# EAGLE board ESE323-Oscilloscope Project (EAGLE 9.7.0)
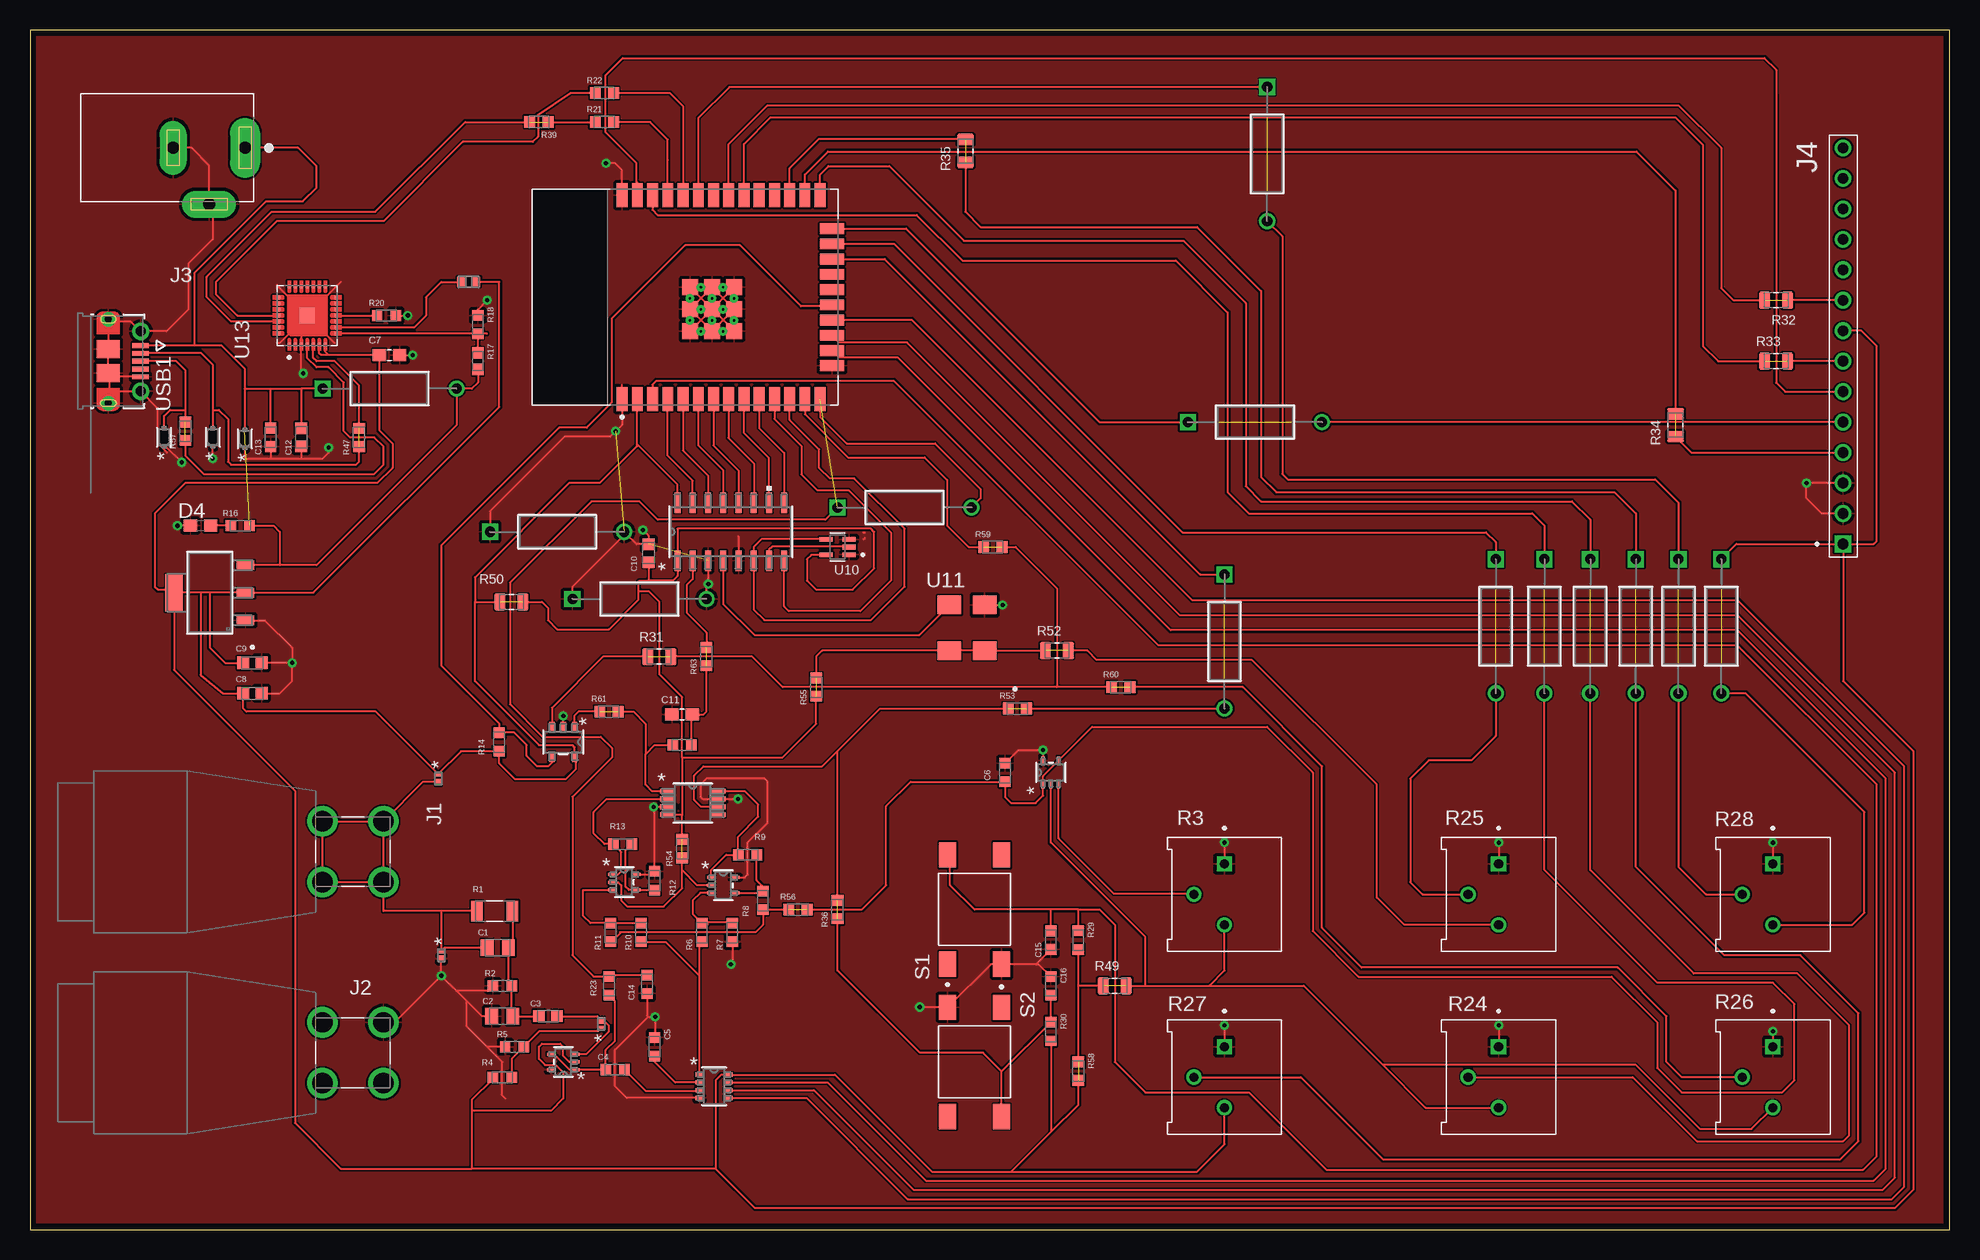
[diagram p0: board, top side]
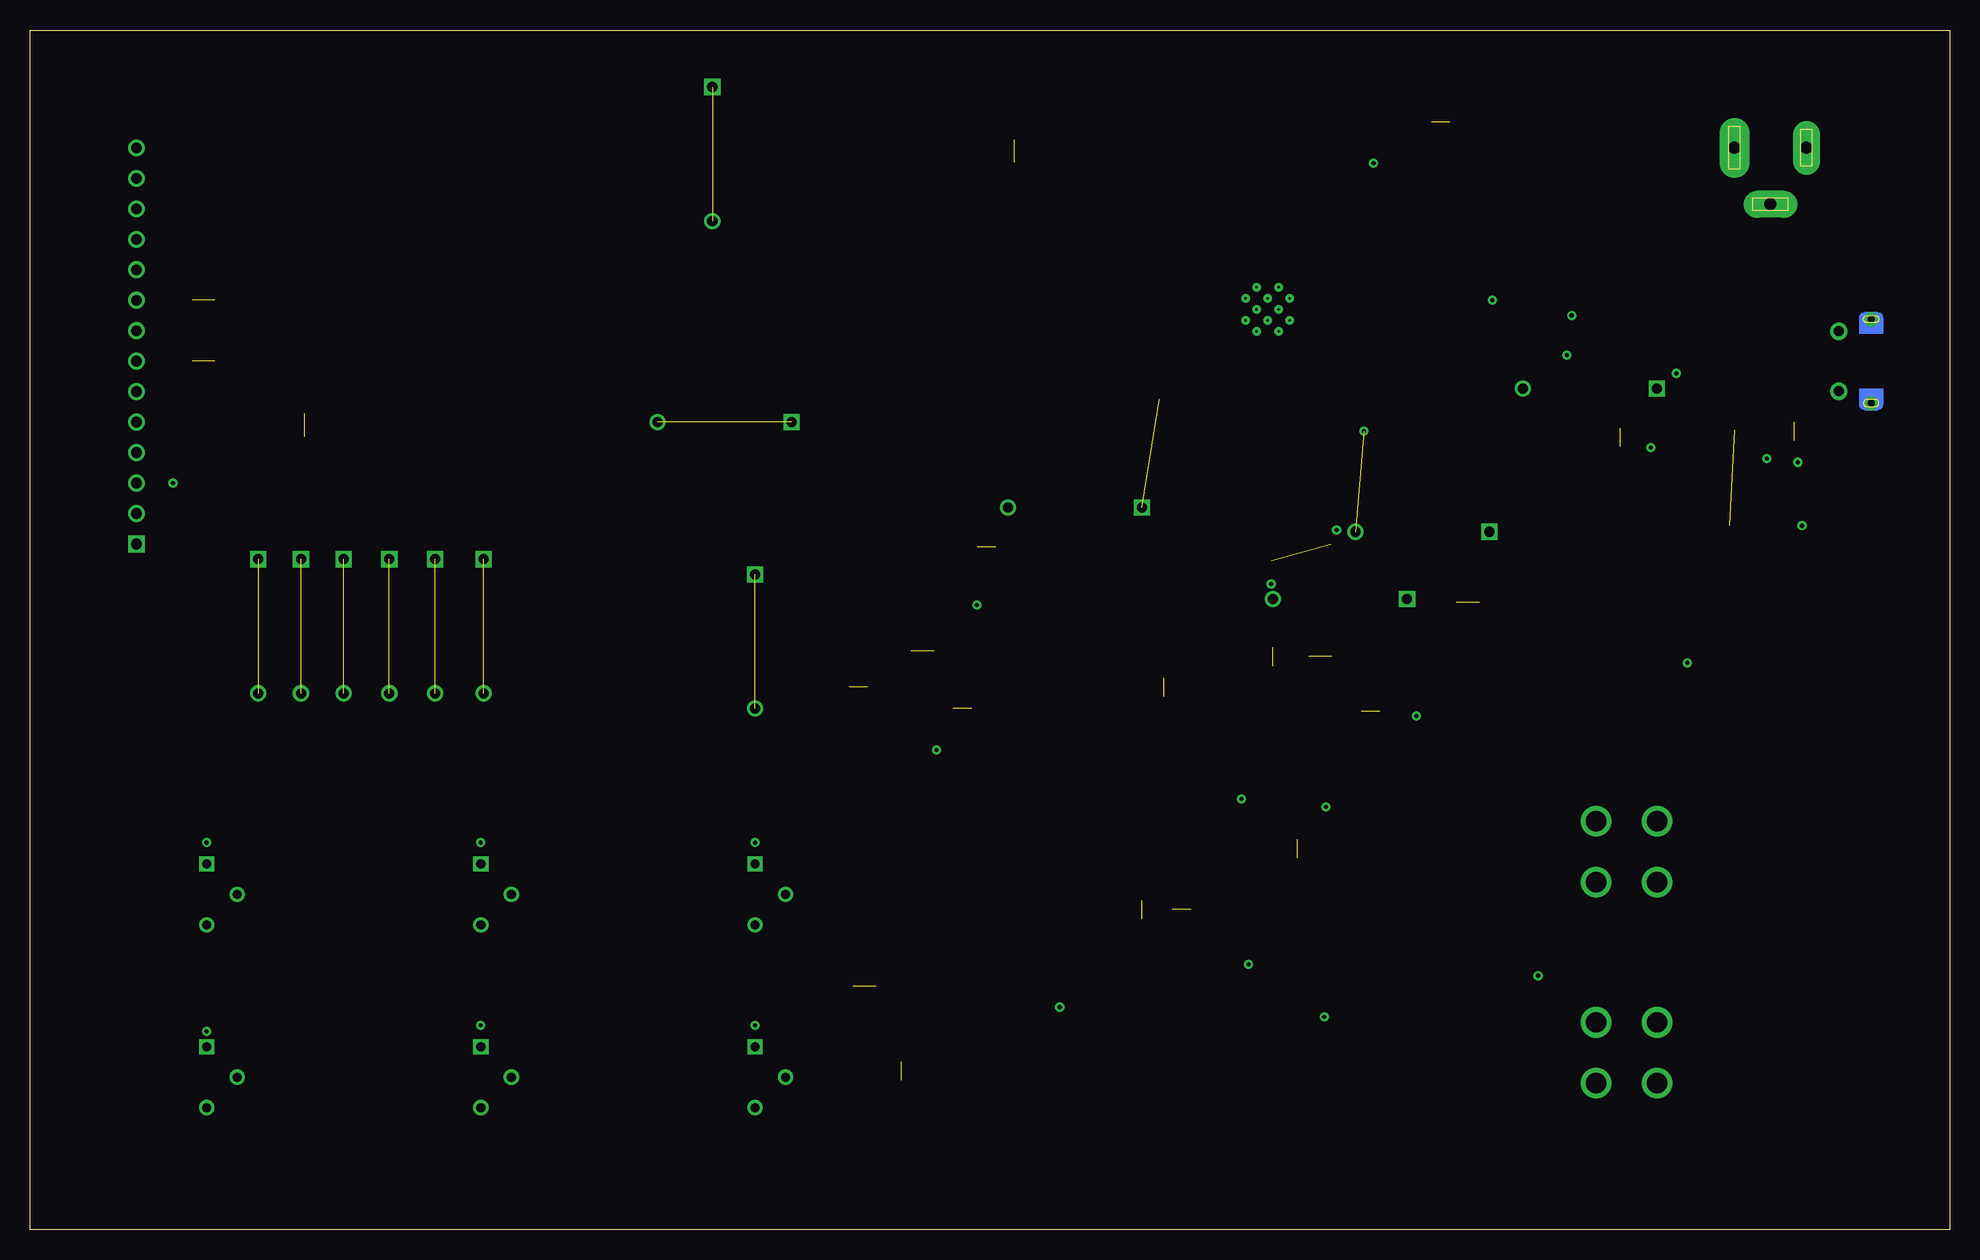
[diagram p1: board, bottom side, seen from below]

Size 160 x 100 mm. Coordinates in mm from the lower left corner, seen from the top.
Outline: 0,0 160,0 160,100 0,100 0,0
Copper layers (1*16): Top / Bottom
Stack-up Default Layer Stack: Top User Defined 0.035mm / Dielectric-1 User Defined 1.5mm / Bottom User Defined 0.035mm
Design rules: minimum copper width 6mil, minimum drill size 6mil, copper clearance wire_polygon to wire_polygon 6mil, copper clearance wire_polygon to pad_smd 6mil, copper clearance wire_polygon to via 6mil, copper clearance pad_smd to pad_smd 6mil, copper clearance pad_smd to via 6mil, copper clearance via to via 6mil, copper clearance smd to pad (same net) 6mil, copper clearance smd to via (same net) 6mil, copper clearance smd to smd (same net) 6mil, dimension clearance 20mil, restrict clearance 0mil, drill distance 6mil, keepout clearance 0mil

## Footprints (pad centres in the part's own frame; a part is rotated, then mirrored left to right if it is on the bottom)
GRM2165C2A102JA01D = smd 1.05 x 1.38: 1 -0.888,0; 2 0.888,0
GRM2195C1H912JA01D = smd 1.05 x 1.38: 1 -0.888,0; 2 0.888,0
GRM188R61A106ME69D = smd 0.96 x 0.97: 1 -0.755,0; 2 0.755,0
GCJ188R71H104KA12D = smd 0.89 x 0.93: 1 -0.77,0; 2 0.77,0
CAPC1608X90 = smd 1.1 x 1: 1 -0.85,0; 2 0.85,0
GRM188R60J476ME15J = smd 1 x 1.02: 1 -0.759,0; 2 0.759,0
CC0603JRNPO9BN501 = smd 1.1 x 1: 1 -0.85,0; 2 0.85,0
CR_NSR05_ONS-L = smd 0.406 x 0.508: 1 -0.368,0 | smd 0.559 x 0.508: 2 0.292,0
LTST-C191KRKT-0603 = smd 1.1 x 1: 1 -0.85,0; 2 0.85,0
D5V0L1B2T_7-SOD523_DIO-L = smd 0.402 x 0.299: 1 -0.751,0; 2 0.751,0
CALTEST_CT3151-2 = drill 1.7: 1 -2.54,2.54; 2 2.54,2.54; 3 -2.54,-2.54; 4 2.54,-2.54
CALTEST_CT3151-0 = drill 1.7: 1 -2.54,2.54; 2 2.54,2.54; 3 -2.54,-2.54; 4 2.54,-2.54
CUI_PJ-202A = drill 1 pad 2.5 long: 1 -6.5,0 | drill 1 pad 2.25 long: 2 -0.5,0; 3 -3.5,4.7
PPTC141LFBN-RC = drill 0.89 square: 1 -5.08,0 | drill 0.89: 2 -2.54,0; 3 0,0; 4 2.54,0; 5 5.08,0; 6 7.62,0; 7 10.16,0; 8 12.7,0; 9 15.24,0; 10 17.78,0; 11 20.32,0; 12 22.86,0; 13 25.4,0; 14 27.94,0
RT1206CRE07900KL = smd 0.97 x 1.73: 1 -1.48,0; 2 1.48,0
ESR03EZPJ103 = smd 0.87 x 0.93: 1 -0.78,0; 2 0.78,0
TRIM_3386P-1-101TLF = drill 0.76 square: 1 -2.54,-0.015 | drill 0.76: 2 0,-2.555; 3 2.54,-0.015
ESR03EZPJ202 = smd 0.87 x 0.93: 1 -0.78,0; 2 0.78,0
RNCP0603FTD22K1 = smd 0.97 x 0.93: 1 -0.68,0; 2 0.68,0
RNCF0603DTE47K5 = smd 0.87 x 0.93: 1 -0.755,0; 2 0.755,0
STA_RNCP0603_STP-L = smd 0.711 x 0.838: 1 -0.597,0; 2 0.597,0
RMCF0603ZT0R00 = smd 0.9 x 0.97: 1 -0.76,0; 2 0.76,0
RESC2012X60N = smd 0.92 x 1.38: 1 -0.955,0; 2 0.955,0
STA_CD14_STP = drill 0.838 pad 1.346 square: 1 0,0 | drill 0.838 pad 1.346: 2 11.176,0
SW_TS04-66-50-BK-260-SMT = smd 2.1 x 1.4: 1 -4.55,2.25; 2 -4.55,-2.25; 3 4.55,2.25; 4 4.55,-2.25
AD8565-L = smd 0.673 x 0.254: 1 -1.01,0.65; 2 -1.01,0; 3 -1.01,-0.65; 4 1.01,-0.65; 5 1.01,0.65
LTC6910-4-TSOT-23-L = smd 0.673 x 0.356: 1 -1.213,0.975; 2 -1.213,0.325; 3 -1.213,-0.325; 4 -1.213,-0.975; 5 1.213,-0.975; 6 1.213,-0.325; 7 1.213,0.325; 8 1.213,0.975
ADG1419-L = smd 1.206 x 0.4: 1 -2.124,0.975; 2 -2.124,0.325; 3 -2.124,-0.325; 4 -2.124,-0.975; 5 2.124,-0.975; 6 2.124,-0.325; 7 2.124,0.325; 8 2.124,0.975
LMV331-L = smd 0.802 x 0.449: 1 -1.251,0.95; 2 -1.251,0; 3 -1.251,-0.95; 4 1.251,-0.95; 5 1.251,0.95
AZ1117CH-3.3TRG1-SOT-223_DIO-L = smd 0.8 x 1.456: 1 -2.3,-2.974; 2 0,-2.974; 3 2.3,-2.974 | smd 3.1 x 1.456: 4 0,2.974
AD7819-L = smd 1.676 x 0.508: 1 -2.413,4.445; 2 -2.413,3.175; 3 -2.413,1.905; 4 -2.413,0.635; 5 -2.413,-0.635; 6 -2.413,-1.905; 7 -2.413,-3.175; 8 -2.413,-4.445; 9 2.413,-4.445; 10 2.413,-3.175; 11 2.413,-1.905; 12 2.413,-0.635; 13 2.413,0.635; 14 2.413,1.905; 15 2.413,3.175; 16 2.413,4.445
SN74LVC1G125DCKR-SOT65P210X110-5N = smd 1.19 x 0.4: 1 -0.96,0.65; 2 -0.96,0; 3 -0.96,-0.65; 4 0.96,-0.65; 5 0.96,0.65
510KCAM200000BAG = smd 1.95 x 1.55: 1 -0.83,1.27; 2 -0.83,-2.54; 3 2.1,-2.54; 4 2.1,1.27
MODULE_ESP32-WROOM-32 = smd 2 x 0.9: 1 -8.5,5.26; 2 -8.5,3.99; 3 -8.5,2.72; 4 -8.5,1.45; 5 -8.5,0.18; 6 -8.5,-1.09; 7 -8.5,-2.36; 8 -8.5,-3.63; 9 -8.5,-4.9; 10 -8.5,-6.17; 11 -8.5,-7.44; 12 -8.5,-8.71; 13 -8.5,-9.98; 14 -8.5,-11.25; 25 8.5,-11.25; 26 8.5,-9.98; 27 8.5,-8.71; 28 8.5,-7.44; 29 8.5,-6.17; 30 8.5,-4.9; 31 8.5,-3.63; 32 8.5,-2.36; 33 8.5,-1.09; 34 8.5,0.18; 35 8.5,1.45; 36 8.5,2.72; 37 8.5,3.99; 38 8.5,5.26 | smd 0.9 x 2: 15 -5.715,-12.25; 16 -4.445,-12.25; 17 -3.175,-12.25; 18 -1.905,-12.25; 19 -0.635,-12.25; 20 0.635,-12.25; 21 1.905,-12.25; 22 3.175,-12.25; 23 4.445,-12.25; 24 5.715,-12.25 | smd 1.33 x 1.33: 39_1 -2.835,-0.405; 39_2 -1,-0.405; 39_3 0.835,-0.405; 39_4 -2.835,-2.24; 39_5 -1,-2.24; 39_6 0.835,-2.24; 39_7 -2.835,-4.075; 39_8 -1,-4.075; 39_9 0.835,-4.075 | drill 0.2 pad 0.3: 39_10 -1.917,-0.405; 39_11 -0.083,-0.405; 39_12 -2.835,-1.323; 39_13 -1,-1.323; 39_14 0.835,-1.323; 39_15 -1.917,-2.24; 39_16 -0.083,-2.24; 39_17 -2.835,-3.158; 39_18 -1,-3.158; 39_19 0.835,-3.158; 39_20 -1.917,-4.075; 39_21 -0.083,-4.075
IC_CP2102N-A02-GQFN28R = smd 0.25 x 0.25: 1 -2.4,1.5; 2 -2.4,1; 3 -2.4,0.5; 4 -2.4,0; 5 -2.4,-0.5; 6 -2.4,-1; 7 -2.4,-1.5; 8 -1.5,-2.4; 9 -1,-2.4; 10 -0.5,-2.4; 11 0,-2.4; 12 0.5,-2.4; 13 1,-2.4; 14 1.5,-2.4; 15 2.4,-1.5; 16 2.4,-1; 17 2.4,-0.5; 18 2.4,0; 19 2.4,0.5; 20 2.4,1; 21 2.4,1.5; 22 1.5,2.4; 23 1,2.4; 24 0.5,2.4; 25 0,2.4; 26 -0.5,2.4; 27 -1,2.4; 28 -1.5,2.4 | smd 1.27 x 1.27: 29 0,0
MOLEX_1050170001 = smd 0.4 x 1.35: 1 -1.3,4.125; 2 -0.65,4.125; 3 0,4.125; 4 0.65,4.125; 5 1.3,4.125 | drill 0.85 pad 1.45: SH1 -2.5,4.15; SH2 2.5,4.15 | drill 0.6 pad 1.2: SH3 -3.5,1.45; SH6 3.5,1.45 | smd 1.5 x 1.9: SH4 -1,1.45; SH5 1,1.45

## Placement (x,y rotation side)
C1  GRM2165C2A102JA01D  [GRM2165C2A102JA01D]  38.99,23.5 0 top
C2  GRM2195C1H912JA01D  [GRM2195C1H912JA01D]  39.37,17.78 0 top
C3  GRM188R61A106ME69D  [GRM188R61A106ME69D]  43.18,17.78 0 top
C4  GCJ188R71H104KA12D  [GCJ188R71H104KA12D]  48.77,13.34 0 top
C5  GRT188R61H105KE13D  [GCJ188R71H104KA12D]  52.07,15.24 270 top
C6  GCJ188R71H104KA12D  [GCJ188R71H104KA12D]  81.28,38.1 270 top
C7  C0603C475K9PACTU  [CAPC1608X90]  29.97,72.9 0 top
C8  GRM188R60J476ME15J  [GRM188R60J476ME15J]  18.54,44.7 180 top
C9  GRM188R60J476ME15J  [GRM188R60J476ME15J]  18.54,47.24 180 top
C10  GRM188R61A106ME69D  [GRM188R61A106ME69D]  51.56,56.39 270 top
C11  CC0603JRNPO9BN501  [CC0603JRNPO9BN501]  54.36,42.93 0 top
C12  GRM188R61A106ME69D  [GRM188R61A106ME69D]  22.61,66.04 90 top
C13  GCJ188R71H104KA12D  [GCJ188R71H104KA12D]  20.07,66.04 90 top
C14  GCJ188R71H104KA12D  [GCJ188R71H104KA12D]  51.44,20.45 90 top
C15  GCJ188R71H104KA12D  [GCJ188R71H104KA12D]  85.09,24.13 90 top
C16  GCJ188R71H104KA12D  [GCJ188R71H104KA12D]  85.09,20.32 270 top
D1  NSR05F40NXT5GCR_NSR05_ONS-L  [CR_NSR05_ONS-L]  34.04,37.59 270 top
D2  NSR05F40NXT5GCR_NSR05_ONS-L  [CR_NSR05_ONS-L]  34.29,22.86 270 top
D3  NSR05F40NXT5GCR_NSR05_ONS-L  [CR_NSR05_ONS-L]  47.62,17.14 90 top
D4  LTST-C191KRKT  [LTST-C191KRKT-0603]  14.22,58.67 0 top
D5  D5V0L1B2T-7SOD523_DIO-L  [D5V0L1B2T_7-SOD523_DIO-L]  11.18,66.04 90 top
D6  D5V0L1B2T-7SOD523_DIO-L  [D5V0L1B2T_7-SOD523_DIO-L]  15.24,66.04 90 top
D7  D5V0L1B2T-7SOD523_DIO-L  [D5V0L1B2T_7-SOD523_DIO-L]  17.91,65.91 90 top
J1  CT3151-2  [CALTEST_CT3151-2]  26.92,31.5 270 top
J2  CT3151-0  [CALTEST_CT3151-0]  26.92,14.73 270 top
J3  PJ-202A  [CUI_PJ-202A]  11.43,90.17 180 top
J4  PPTC141LFBN-RC  [PPTC141LFBN-RC]  151.13,62.23 90 top
R1  RT1206CRE07900KL  [RT1206CRE07900KL]  38.73,26.54 0 top
R2  ESR03EZPJ104  [ESR03EZPJ103]  39.37,20.32 0 top
R3  3386P-1-101TLF  [TRIM_3386P-1-101TLF]  99.57,27.94 270 top
R4  ESR03EZPJ103  [ESR03EZPJ103]  39.37,12.7 180 top
R5  ESR03EZPJ103  [ESR03EZPJ103]  40.39,15.24 0 top
R6  ESR03EZPJ103  [ESR03EZPJ103]  56.01,24.77 90 top
R7  ESR03EZPJ103  [ESR03EZPJ103]  58.55,24.77 90 top
R8  ESR03EZPJ103  [ESR03EZPJ103]  61.09,27.43 90 top
R9  ESR03EZPJ103  [ESR03EZPJ103]  59.82,31.24 180 top
R10  ESR03EZPJ103  [ESR03EZPJ103]  50.93,24.77 90 top
R11  ESR03EZPJ103  [ESR03EZPJ103]  48.39,24.77 90 top
R12  ESR03EZPJ103  [ESR03EZPJ103]  52.07,29.08 270 top
R13  ESR03EZPJ103  [ESR03EZPJ103]  49.4,32.13 180 top
R14  RT0603DRE075K1L  [ESR03EZPJ103]  39.12,40.64 270 top
R15  ESR03EZPJ302  [ESR03EZPJ103]  54.36,40.39 0 top
R16  ESR03EZPJ202  [ESR03EZPJ202]  17.53,58.67 0 top
R17  RNCP0603FTD22K1  [RNCP0603FTD22K1]  37.34,72.39 270 top
R18  RNCF0603DTE47K5  [RNCF0603DTE47K5]  37.34,75.44 270 top
R19  RNCP0603FTD1K00STA_RNCP0603_STP-L  [STA_RNCP0603_STP-L]  36.58,78.99 0 top
R20  ESR03EZPJ103  [ESR03EZPJ103]  29.72,76.2 0 top
R21  RMCF0603ZT0R00  [RMCF0603ZT0R00]  47.88,92.33 0 top
R22  RMCF0603ZT0R00  [RMCF0603ZT0R00]  47.88,94.74 0 top
R23  ESR03EZPJ104  [ESR03EZPJ103]  48.26,20.32 270 top
R24  3386P-1-101TLF  [TRIM_3386P-1-101TLF]  122.43,12.7 270 top
R25  3386P-1-101TLF  [TRIM_3386P-1-101TLF]  122.43,27.94 270 top
R26  3386P-1-101TLF  [TRIM_3386P-1-101TLF]  145.29,12.7 270 top
R27  3386P-1-101TLF  [TRIM_3386P-1-101TLF]  99.57,12.7 270 top
R28  3386P-1-101TLF  [TRIM_3386P-1-101TLF]  145.29,27.94 270 top
R29  ESR03EZPJ103  [ESR03EZPJ103]  87.38,24.13 270 top
R30  ESR03EZPJ103  [ESR03EZPJ103]  85.09,16.51 270 top
R31  RC0805JR-070RL  [RESC2012X60N]  52.45,47.75 0 top
R32  RC0805JR-070RL  [RESC2012X60N]  145.54,77.47 180 top
R33  RC0805JR-070RL  [RESC2012X60N]  145.54,72.39 0 top
R34  RC0805JR-070RL  [RESC2012X60N]  137.16,67.06 90 top
R35  RC0805JR-070RL  [RESC2012X60N]  77.98,89.92 90 top
R36  RMCF0603ZT0R00  [RMCF0603ZT0R00]  67.31,26.67 90 top
R37  CD14ZT0R00STA_CD14_STP  [STA_CD14_STP]  67.31,60.2 0 top
R38  CD14ZT0R00STA_CD14_STP  [STA_CD14_STP]  99.57,54.61 270 top
R39  RMCF0603ZT0R00  [RMCF0603ZT0R00]  42.42,92.33 180 top
R40  CD14ZT0R00STA_CD14_STP  [STA_CD14_STP]  103.12,95.25 270 top
R41  CD14ZT0R00STA_CD14_STP  [STA_CD14_STP]  96.52,67.31 0 top
R42  CD14ZT0R00STA_CD14_STP  [STA_CD14_STP]  130.05,55.88 270 top
R43  CD14ZT0R00STA_CD14_STP  [STA_CD14_STP]  122.17,55.88 270 top
R44  CD14ZT0R00STA_CD14_STP  [STA_CD14_STP]  133.86,55.88 270 top
R45  CD14ZT0R00STA_CD14_STP  [STA_CD14_STP]  137.41,55.88 270 top
R46  CD14ZT0R00STA_CD14_STP  [STA_CD14_STP]  126.24,55.88 270 top
R47  RMCF0603ZT0R00  [RMCF0603ZT0R00]  27.43,66.04 90 top
R48  CD14ZT0R00STA_CD14_STP  [STA_CD14_STP]  24.38,70.1 0 top
R49  RC0805JR-070RL  [RESC2012X60N]  90.42,20.32 0 top
R50  RC0805JR-070RL  [RESC2012X60N]  40.13,52.32 0 top
R51  CD14ZT0R00STA_CD14_STP  [STA_CD14_STP]  140.97,55.88 270 top
R52  RC0805JR-070RL  [RESC2012X60N]  85.6,48.26 0 top
R53  RMCF0603ZT0R00  [RMCF0603ZT0R00]  82.3,43.43 0 top
R54  RMCF0603ZT0R00  [RMCF0603ZT0R00]  54.36,31.75 90 top
R55  RMCF0603ZT0R00  [RMCF0603ZT0R00]  65.53,45.21 90 top
R56  RMCF0603ZT0R00  [RMCF0603ZT0R00]  64.01,26.67 0 top
R57  RMCF0603ZT0R00  [RMCF0603ZT0R00]  12.95,66.55 90 top
R58  RMCF0603ZT0R00  [RMCF0603ZT0R00]  87.38,13.21 270 top
R59  RMCF0603ZT0R00  [RMCF0603ZT0R00]  80.26,56.9 0 top
R60  RMCF0603ZT0R00  [RMCF0603ZT0R00]  90.93,45.21 0 top
R61  RMCF0603ZT0R00  [RMCF0603ZT0R00]  48.26,43.18 0 top
R62  CD14ZT0R00STA_CD14_STP  [STA_CD14_STP]  38.35,58.17 0 top
R63  RMCF0603ZT0R00  [RMCF0603ZT0R00]  56.39,47.75 90 top
R64  CD14ZT0R00STA_CD14_STP  [STA_CD14_STP]  45.21,52.57 0 top
S1  TS04-66-50-BK-260-SMT  [SW_TS04-66-50-BK-260-SMT]  78.74,26.67 90 top
S2  TS04-66-50-BK-260-SMT  [SW_TS04-66-50-BK-260-SMT]  78.74,13.97 270 top
U1  AD8565AKSZ-REEL7KS_5_ADI-L  [AD8565-L]  44.45,13.97 180 top
U2  AD8565AKSZ-REEL7KS_5_ADI-L  [AD8565-L]  85.09,38.1 90 top
U3  LTC6910-3CTS8TRMPBFTSOT-23_TS8_LIT-L  [LTC6910-4-TSOT-23-L]  57.02,11.94 0 top
U4  AD8565AKSZ-REEL7KS_5_ADI-L  [AD8565-L]  57.78,28.7 0 top
U5  AD8565AKSZ-REEL7KS_5_ADI-L  [AD8565-L]  49.53,28.96 0 top
U6  ADG1419BRMZ-REEL7RM_8_ADI-L  [ADG1419-L]  55.24,35.56 0 top
U7  LMV331W5-7SOT25_DIO-L  [LMV331-L]  44.45,40.64 270 top
U8  AZ1117CH-3.3TRG1SOT-223_DIO-L  [AZ1117CH-3.3TRG1-SOT-223_DIO-L]  14.99,53.09 90 top
U9  AD7819YRZR_16_ADI-L  [AD7819-L]  58.42,58.17 90 top
U10  SN74LVC1G125DCKR  [SN74LVC1G125DCKR-SOT65P210X110-5N]  67.31,56.9 180 top
U11  510KCAM200000BAG  [510KCAM200000BAG]  78.74,49.53 180 top
U12  ESP32-WROOM-32  [MODULE_ESP32-WROOM-32]  54.61,77.72 90 top
U13  CP2102N-A02-GQFN28R  [IC_CP2102N-A02-GQFN28R]  23.11,76.2 90 top
USB1  1050170001  [MOLEX_1050170001]  5.08,72.39 270 top

## Library data of the parts
C1 = ESE323_Project_Library; CHECK_PRICES: https://www.snapeda.com/parts/GRM2165C2A102JA01D/Murata+Electronics+North+America/view-part/?ref=eda; DESCRIPTION: 0805 1000 pF 100 V ±5% Tolerance C0G Multilayer Ceramic Capacitor; DIGIKEY_PART_NUMBER: 490-6445-2-ND; MF: Murata Electronics; MP: GRM2165C2A102JA01D; PACKAGE: 2012 Murata; PURCHASE-URL: https://www.snapeda.com/api/url_track_click_mouser/?unipart_id=1837721&manufacturer=Murata Electronics&part_name=GRM2165C2A102JA01D&search_term=None; SNAPEDA_LINK: https://www.snapeda.com/parts/GRM2165C2A102JA01D/Murata+Electronics+North+America/view-part/?ref=snap
C2 J2 R1 R2 R4-R13 R20 R23 R29 R30 U11 = ESE323_Project_Library
C3 C10 C12 = ESE323_Project_Library; CHECK_PRICES: https://www.snapeda.com/parts/GRM188R61A106ME69D/Murata+Electronics+North+America/view-part/?ref=eda; DESCRIPTION: SMD capacitor X5R(EIA) with capacitance 10uF Tol.20%. Rated voltage 10Vdc 85C; DIGIKEY_PART_NUMBER: 490-10475-2-ND; MF: Murata; MP: GRM188R61A106ME69D; PACKAGE: 1608 Murata; PURCHASE-URL: https://www.snapeda.com/api/url_track_click_mouser/?unipart_id=589707&manufacturer=Murata&part_name=GRM188R61A106ME69D&search_term=None; SNAPEDA_LINK: https://www.snapeda.com/parts/GRM188R61A106ME69D/Murata+Electronics+North+America/view-part/?ref=snap
C4 C6 C13-C16 = ESE323_Project_Library; CHECK_PRICES: https://www.snapeda.com/parts/GCJ188R71H104KA12D/Murata+Electronics+North+America/view-part/?ref=eda; DESCRIPTION: 0.1 µF ±10% 50V Ceramic Capacitor X7R 0603 (1608 Metric); DIGIKEY_PART_NUMBER: 490-5798-2-ND; MF: Murata Electronics; MP: GCJ188R71H104KA12D; PACKAGE: 1608 Murata; PURCHASE-URL: https://www.snapeda.com/api/url_track_click_mouser/?unipart_id=667734&manufacturer=Murata Electronics&part_name=GCJ188R71H104KA12D&search_term=None; SNAPEDA_LINK: https://www.snapeda.com/parts/GCJ188R71H104KA12D/Murata+Electronics+North+America/view-part/?ref=snap
C5 = ESE323_Project_Library; CHECK_PRICES: https://www.snapeda.com/parts/GRT188R61H105KE13D/Murata+Electronics+North+America/view-part/?ref=eda; DESCRIPTION: 1 µF ±10% 50V Ceramic Capacitor X5R 0603 (1608 Metric); DIGIKEY_PART_NUMBER: 490-12330-2-ND; MF: Murata; MP: GRT188R61H105KE13D; PACKAGE: 1608 Murata; PURCHASE-URL: https://www.snapeda.com/api/url_track_click_mouser/?unipart_id=1767599&manufacturer=Murata&part_name=GRT188R61H105KE13D&search_term=None; SNAPEDA_LINK: https://www.snapeda.com/parts/GRT188R61H105KE13D/Murata+Electronics+North+America/view-part/?ref=snap
C7 = ESE323_Project_Library; CHECK_PRICES: https://www.snapeda.com/parts/C0603C475K9PACTU/KEMET/view-part/?ref=eda; DESCRIPTION: 0603 C 4.7uF Ceramic Multilayer Capacitor, 6.3 VDC, +85degC, X5R Dielec, +/-10% | KEMET C0603C475K9PACTU; MF: KEMET; MP: C0603C475K9PACTU; PACKAGE: 0603 Kemet; SNAPEDA_LINK: https://www.snapeda.com/parts/C0603C475K9PACTU/KEMET/view-part/?ref=snap
C8 C9 = ESE323_Project_Library; CHECK_PRICES: https://www.snapeda.com/parts/GRM188R60J476ME15J/Murata/view-part/?ref=eda; DESCRIPTION: SMD capacitor X5R(EIA) with capacitance 47uF Tol.20%. Rated voltage 6.3Vdc 85C; DIGIKEY_PART_NUMBER: 490-GRM188R60J476ME15JTR-ND; MF: Murata; MP: GRM188R60J476ME15J; PACKAGE: 1608 Murata; PURCHASE-URL: https://www.snapeda.com/api/url_track_click_mouser/?unipart_id=1988705&manufacturer=Murata&part_name=GRM188R60J476ME15J&search_term=None; SNAPEDA_LINK: https://www.snapeda.com/parts/GRM188R60J476ME15J/Murata/view-part/?ref=snap
C11 = ESE323_Project_Library; CHECK_PRICES: https://www.snapeda.com/parts/CC0603JRNPO9BN501/Yageo/view-part/?ref=eda; DESCRIPTION: 500 pF ±5% 50V Ceramic Capacitor C0G, NP0 0603 (1608 Metric); DIGIKEY_PART_NUMBER: 13-CC0603JRNPO9BN501TR-ND; MF: Yageo; MP: CC0603JRNPO9BN501; PACKAGE: 0603 Yageo; PURCHASE-URL: https://www.snapeda.com/api/url_track_click_mouser/?unipart_id=1822519&manufacturer=Yageo&part_name=CC0603JRNPO9BN501&search_term=None; SNAPEDA_LINK: https://www.snapeda.com/parts/CC0603JRNPO9BN501/Yageo/view-part/?ref=snap
D1-D3 = ESE323_Project_Library; COPYRIGHT: Copyright (C) 2023 Ultra Librarian. All rights reserved.; MANUFACTURER_PART_NUMBER: NSR05F40NXT5G; MFR_NAME: onsemi
D4 = ESE323_Project_Library; CHECK_PRICES: https://www.snapeda.com/parts/LTST-C191KRKT/Lite-On+Inc./view-part/?ref=eda; DESCRIPTION: Red 631nm LED Indication - Discrete 2V 0603 (1608 Metric); DIGIKEY_PART_NUMBER: 160-1447-2-ND; MF: Lite-On Inc.; MP: LTST-C191KRKT; PACKAGE: 0603 Lite-On Inc.; PURCHASE-URL: https://www.snapeda.com/api/url_track_click_mouser/?unipart_id=234319&manufacturer=Lite-On Inc.&part_name=LTST-C191KRKT&search_term=None; SNAPEDA_LINK: https://www.snapeda.com/parts/LTST-C191KRKT/Lite-On+Inc./view-part/?ref=snap
D5-D7 = ESE323_Project_Library; COPYRIGHT: Copyright (C) 2023 Ultra Librarian. All rights reserved.; MANUFACTURER_PART_NUMBER: D5V0L1B2T-7; MFR_NAME: Diodes Inc
J1 = ESE323_Project_Library; CHECK_PRICES: https://www.snapeda.com/parts/CT3151-2/Cal+Test+Electronics/view-part/?ref=eda; DESCRIPTION: Banana Jack Connector Standard Banana Solder Red; DIGIKEY_PART_NUMBER: BKCT3151-2-ND; MF: Cal Test; MP: CT3151-2; PACKAGE: None; PURCHASE-URL: https://www.snapeda.com/api/url_track_click_mouser/?unipart_id=552573&manufacturer=Cal Test&part_name=CT3151-2&search_term=None; SNAPEDA_LINK: https://www.snapeda.com/parts/CT3151-2/Cal+Test+Electronics/view-part/?ref=snap
J3 = ESE323_Project_Library; CHECK_PRICES: https://www.snapeda.com/parts/PJ-202A/CUI+Devices/view-part/?ref=eda; CUI_PURCHASE_URL: https://www.cuidevices.com/product/interconnect/connectors/dc-power-connectors/jacks/pj-202a?utm_source=snapeda.com&utm_medium=referral&utm_campaign=snapedaBOM; DESCRIPTION: 2.0 x 6.5 mm, 2.5 A, Horizontal, Through Hole, Kinked Pins, Dc Power Jack Connector; DIGIKEY_PART_NUMBER: CP-202A-ND; MF: CUI Devices; MP: PJ-202A; PACKAGE: None; PURCHASE-URL: https://www.snapeda.com/api/url_track_click_mouser/?unipart_id=153805&manufacturer=CUI Devices&part_name=PJ-202A&search_term=None; SNAPEDA_LINK: https://www.snapeda.com/parts/PJ-202A/CUI+Devices/view-part/?ref=snap
J4 = ESE323_Project_Library; AVAILABILITY: In Stock; CENTERLINE_PITCH: 2.54 mm[.1 in]; CHECK_PRICES: https://www.snapeda.com/parts/5-146280-5/TE+Connectivity+AMP+Connectors/view-part/?ref=eda; COMMENT: 5-146280-5; DESCRIPTION: Conn Unshrouded Header HDR 5 POS 2.54mm Solder ST Thru-Hole Carton; EU_ROHS_COMPLIANCE: Compliant; MF: TE Connectivity; MP: 5-146280-5; NUMBER_OF_POSITIONS: 5; PACKAGE: None; PRICE: None; PRODUCT_TYPE: Connector; PURCHASE-URL: https://www.snapeda.com/api/url_track_click_mouser/?unipart_id=700092&manufacturer=TE Connectivity&part_name=5-146280-5&search_term=None; SNAPEDA_LINK: https://www.snapeda.com/parts/5-146280-5/TE+Connectivity+AMP+Connectors/view-part/?ref=snap
R3 R24-R28 = ESE323_Project_Library; MANUFACTURER: Bourns; MAXIMUM_PACKAGE_HEIGHT: 4.83 mm; PARTREV: 08/19; SNAPEDA_PN: 3386P-1-101TLF; STANDARD: IPC 7351B
R14 = ESE323_Project_Library; CHECK_PRICES: https://www.snapeda.com/parts/RT0603DRE075K1L/Yageo/view-part/?ref=eda; DESCRIPTION: Res Thin Film 0603 5.1K Ohm 0.5% 0.1W(1/10W) ±50ppm/°C Pad SMD T/R; DIGIKEY_PART_NUMBER: 311-2632-2-ND; MF: Yageo; MP: RT0603DRE075K1L; PACKAGE: 1608 Yageo; PURCHASE-URL: https://www.snapeda.com/api/url_track_click_mouser/?unipart_id=3854407&manufacturer=Yageo&part_name=RT0603DRE075K1L&search_term=None; SNAPEDA_LINK: https://www.snapeda.com/parts/RT0603DRE075K1L/Yageo/view-part/?ref=snap
R15 = ESE323_Project_Library; CHECK_PRICES: https://www.snapeda.com/parts/ESR03EZPJ302/Rohm/view-part/?ref=eda; DESCRIPTION: 3 kOhms ±5% 0.25W, 1/4W Chip Resistor 0603 (1608 Metric) Automotive AEC-Q200, Pulse Withstanding Thick Film; DIGIKEY_PART_NUMBER: RHM3KDTR-ND; MF: Rohm; MP: ESR03EZPJ302; PACKAGE: 1608 Rohm Semiconductor; PURCHASE-URL: https://www.snapeda.com/api/url_track_click_mouser/?unipart_id=975412&manufacturer=Rohm&part_name=ESR03EZPJ302&search_term=None; SNAPEDA_LINK: https://www.snapeda.com/parts/ESR03EZPJ302/Rohm/view-part/?ref=snap
R16 = ESE323_Project_Library; CHECK_PRICES: https://www.snapeda.com/parts/ESR03EZPJ202/Rohm/view-part/?ref=eda; DESCRIPTION: 2 kOhms ±5% 0.25W, 1/4W Chip Resistor 0603 (1608 Metric) Automotive AEC-Q200, Pulse Withstanding Thick Film; DIGIKEY_PART_NUMBER: RHM2.0KDTR-ND; MF: Rohm; MP: ESR03EZPJ202; PACKAGE: 1608 Rohm Semiconductor; PURCHASE-URL: https://www.snapeda.com/api/url_track_click_mouser/?unipart_id=978373&manufacturer=Rohm&part_name=ESR03EZPJ202&search_term=None; SNAPEDA_LINK: https://www.snapeda.com/parts/ESR03EZPJ202/Rohm/view-part/?ref=snap
R17 = ESE323_Project_Library; CHECK_PRICES: https://www.snapeda.com/parts/RNCP0603FTD22K1/Stackpole+Electronics+Inc/view-part/?ref=eda; DESCRIPTION: Res Thin Film 0603 22.1K Ohm 1% 0.125W(1/8W) ±100ppm/°C Sulfur Resistant Pad SMD T/R; DIGIKEY_PART_NUMBER: RNCP0603FTD22K1TR-ND; MF: Stackpole Electronics Inc; MP: RNCP0603FTD22K1; PACKAGE: 1508 Stackpole; PURCHASE-URL: https://www.snapeda.com/api/url_track_click_mouser/?unipart_id=3989807&manufacturer=Stackpole Electronics Inc&part_name=RNCP0603FTD22K1&search_term=None; SNAPEDA_LINK: https://www.snapeda.com/parts/RNCP0603FTD22K1/Stackpole+Electronics+Inc/view-part/?ref=snap
R18 = ESE323_Project_Library; CHECK_PRICES: https://www.snapeda.com/parts/RNCF0603DTE47K5/Stackpole+Electronics+Inc/view-part/?ref=eda; DESCRIPTION: RES 47.5K OHM 0.5% 1/10W 0603; DIGIKEY_PART_NUMBER: 738-RNCF0603DTE47K5TR-ND; MF: Stackpole Electronics Inc; MP: RNCF0603DTE47K5; PACKAGE: 1508 Stackpole; PURCHASE-URL: https://www.snapeda.com/api/url_track_click_mouser/?unipart_id=3965254&manufacturer=Stackpole Electronics Inc&part_name=RNCF0603DTE47K5&search_term=None; SNAPEDA_LINK: https://www.snapeda.com/parts/RNCF0603DTE47K5/Stackpole+Electronics+Inc/view-part/?ref=snap
R19 = ESE323_Project_Library; COPYRIGHT: Copyright (C) 2023 Ultra Librarian. All rights reserved.; MANUFACTURER_PART_NUMBER: RNCP0603FTD1K00; MFR_NAME: Stackpole International
R21 R22 R36 R39 R47 R53-R61 R63 = ESE323_Project_Library; CHECK_PRICES: https://www.snapeda.com/parts/RMCF0603ZT0R00/Stackpole+Electronics+Inc/view-part/?ref=eda; DESCRIPTION: 0 Ohms Jumper 0.1W, 1/10W Chip Resistor 0603 (1608 Metric) Automotive AEC-Q200 Thick Film; DIGIKEY_PART_NUMBER: RMCF0603ZT0R00TR-ND; MF: Stackpole Electronics; MP: RMCF0603ZT0R00; PACKAGE: 0603 Stackpole Electronics; PURCHASE-URL: https://www.snapeda.com/api/url_track_click_mouser/?unipart_id=483594&manufacturer=Stackpole Electronics&part_name=RMCF0603ZT0R00&search_term=None; SNAPEDA_LINK: https://www.snapeda.com/parts/RMCF0603ZT0R00/Stackpole+Electronics+Inc/view-part/?ref=snap
R31-R35 R49 R50 R52 = ESE323_Project_Library; CHECK_PRICES: https://www.snapeda.com/parts/RC0805JR-070RL/Yageo/view-part/?ref=eda; DESCRIPTION: 0 Ohms Jumper 0.125W, 1/8W Chip Resistor 0805 (2012 Metric) Moisture Resistant Thick Film; DIGIKEY_PART_NUMBER: 311-0.0ARTR-ND; MF: Yageo; MP: RC0805JR-070RL; PACKAGE: 0805 Yageo; PURCHASE-URL: https://www.snapeda.com/api/url_track_click_mouser/?unipart_id=106114&manufacturer=Yageo&part_name=RC0805JR-070RL&search_term=None; SNAPEDA_LINK: https://www.snapeda.com/parts/RC0805JR-070RL/Yageo/view-part/?ref=snap
R37 R38 R40-R46 R48 R51 R62 R64 = ESE323_Project_Library; COPYRIGHT: Copyright (C) 2023 Ultra Librarian. All rights reserved.; MANUFACTURER_PART_NUMBER: CD14ZT0R00; MFR_NAME: Stackpole International
S1 S2 = ESE323_Project_Library; CHECK_PRICES: https://www.snapeda.com/parts/TS04-66-50-BK-260-SMT/CUI+Devices/view-part/?ref=eda; CUI_PURCHASE_URL: https://www.cuidevices.com/product/switches/tactile-switches/ts04-66-50-bk-260-smt?utm_source=snapeda.com&utm_medium=referral&utm_campaign=snapedaBOM; DESCRIPTION: 6 x 6 mm, 5 mm Actuator Height, 260 gf, Black, Surface Mount, SPST, Tactile Switch; DIGIKEY_PART_NUMBER: 2223-TS04-66-50-BK-260-SMT-ND; MF: CUI Devices; MP: TS04-66-50-BK-260-SMT; PACKAGE: None; PURCHASE-URL: https://www.snapeda.com/api/url_track_click_mouser/?unipart_id=8666142&manufacturer=CUI Devices&part_name=TS04-66-50-BK-260-SMT&search_term=None; SNAPEDA_LINK: https://www.snapeda.com/parts/TS04-66-50-BK-260-SMT/CUI+Devices/view-part/?ref=snap
U1 U2 U4 U5 = ESE323_Project_Library; COPYRIGHT: Copyright (C) 2023 Ultra Librarian. All rights reserved.; MANUFACTURER_PART_NUMBER: AD8565AKSZ-REEL7; MFR_NAME: Analog Devices Inc
U3 = ESE323_Project_Library; COPYRIGHT: Copyright (C) 2023 Ultra Librarian. All rights reserved.; MANUFACTURER_PART_NUMBER: LTC6910-3CTS8#TRMPBF; MFR_NAME: Analog Devices Inc
U6 = ESE323_Project_Library; COPYRIGHT: Copyright (C) 2023 Ultra Librarian. All rights reserved.; MANUFACTURER_PART_NUMBER: ADG1419BRMZ-REEL7; MFR_NAME: Analog Devices Inc
U7 = ESE323_Project_Library; COPYRIGHT: Copyright (C) 2023 Ultra Librarian. All rights reserved.; MANUFACTURER_PART_NUMBER: LMV331W5-7; MFR_NAME: Diodes Inc
U8 = ESE323_Project_Library; COPYRIGHT: Copyright (C) 2023 Ultra Librarian. All rights reserved.; MANUFACTURER_PART_NUMBER: AZ1117CH-3.3TRG1; MFR_NAME: Diodes Inc
U9 = ESE323_Project_Library; COPYRIGHT: Copyright (C) 2023 Ultra Librarian. All rights reserved.; MANUFACTURER_PART_NUMBER: AD7819YRZ; MFR_NAME: Analog Devices Inc
U10 = ESE323_Project_Library; CHECK_PRICES: https://www.snapeda.com/parts/SN74LVC1G125DCKR/Texas+Instruments/view-part/?ref=eda; DESCRIPTION: Single 1.65-V to 5.5-V buffer with 3-state outputs; DIGIKEY_PART_NUMBER: 296-11604-2-ND; MF: Texas Instruments; MP: SN74LVC1G125DCKR; PACKAGE: SC70-5 Texas Instruments; PURCHASE-URL: https://www.snapeda.com/api/url_track_click_mouser/?unipart_id=105725&manufacturer=Texas Instruments&part_name=SN74LVC1G125DCKR&search_term=None; SNAPEDA_LINK: https://www.snapeda.com/parts/SN74LVC1G125DCKR/Texas+Instruments/view-part/?ref=snap
U12 = ESE323_Project_Library; CHECK_PRICES: https://www.snapeda.com/parts/ESP32-WROOM-32/Espressif+Systems/view-part/?ref=eda; DESCRIPTION: Bluetooth, WiFi 802.11b/g/n, Bluetooth v4.2 +EDR, Class 1, 2 and 3 Transceiver Module 2.4GHz ~ 2.5GHz Antenna Not Included, U.FL Surface Mount; MF: Espressif Systems; MP: ESP32-WROOM-32; PACKAGE: Non Standard Espressif Systems; SNAPEDA_LINK: https://www.snapeda.com/parts/ESP32-WROOM-32/Espressif+Systems/view-part/?ref=snap
U13 = ESE323_Project_Library; CHECK_PRICES: https://www.snapeda.com/parts/CP2102N-A02-GQFN28R/Silicon+Labs/view-part/?ref=eda; DESCRIPTION: USB Bridge, USB to UART USB 2.0 UART Interface 28-QFN (5x5); DIGIKEY_PART_NUMBER: 336-5890-2-ND; MF: Silicon Labs; MP: CP2102N-A02-GQFN28R; PACKAGE: None; PURCHASE-URL: https://www.snapeda.com/api/url_track_click_mouser/?unipart_id=3595518&manufacturer=Silicon Labs&part_name=CP2102N-A02-GQFN28R&search_term=None; SNAPEDA_LINK: https://www.snapeda.com/parts/CP2102N-A02-GQFN28R/Silicon+Labs/view-part/?ref=snap
USB1 = ESE323_Project_Library; CHECK_PRICES: https://www.snapeda.com/parts/1050170001/Molex/view-part/?ref=eda; DESCRIPTION: USB - micro B USB 2.0 Receptacle Connector 5 Position Surface Mount, Right Angle; Through Hole; DIGIKEY_PART_NUMBER: WM1399TR-ND; MF: Molex; MP: 1050170001; PACKAGE: None; PURCHASE-URL: https://www.snapeda.com/api/url_track_click_mouser/?unipart_id=2755530&manufacturer=Molex&part_name=1050170001&search_term=None; SNAPEDA_LINK: https://www.snapeda.com/parts/1050170001/Molex/view-part/?ref=snap

## Nets
!DRDY: U9.6 U10.4 U12.12
+3.3V: C7.1 C8.2 C9.2 C10.2 D1.1 J4.1 J4.8 R3.3 R4.2 R14.2 R19.2 R24.3 R25.3 R26.3 R27.3 R28.3 R29.2 R30.2 R49.1 R49.2 R50.1 R50.2 R51.1 R51.2 R52.1 R52.2 R54.1 R54.2 R55.1 R55.2 R58.1 R58.2 U1.2 U2.2 U3.8 U4.2 U5.2 U6.4 U7.5 U8.2 U8.4 U9.1 U9.16 U10.5 U11.1 U11.4 U12.2 U13.6 U13.7
+5V_VBUS: C12.2 C13.2 D7.2 J3.1 R16.2 R17.2 R48.1 R48.2 U8.3 USB1.1
D0: U9.8 U12.11
D1: U9.9 U12.10
D2: U9.10 U12.9
D3: U9.11 U12.8
D4: U9.12 U12.7
D5: U9.13 U12.6
D6: U9.14 U12.5
D7: U9.15 U12.4
DC_BIAS: C14.2 R23.1 R37.1 R37.2 U12.14
DC_OFFSET: C6.2 R8.1 R11.1 R46.1 R46.2 R56.1 R56.2 U2.1 U2.4 U12.36
DC_OFFSET_SELECT: C16.2 R30.1 R36.1 R36.2 R38.1 R38.2 R53.1 R53.2 S2.3 U6.6 U12.22
EN: C15.2 R29.1 S1.3 U12.3
GND: C2.1 C5.1 C6.1 C7.2 C8.1 C9.1 C10.1 C11.1 C12.1 C13.1 C14.1 C15.1 C16.1 D2.2 D4.1 D5.1 D6.1 D7.1 J2.1 J3.2 J3.3 J4.2 J4.3 R2.1 R3.1 R5.1 R7.1 R12.1 R18.1 R20.2 R24.1 R25.1 R26.1 R27.1 R28.1 R62.1 R62.2 R64.1 R64.2 S1.2 S2.2 U1.5 U2.5 U3.4 U4.5 U5.5 U6.3 U6.7 U7.2 U8.1 U9.3 U9.5 U10.1 U10.3 U11.2 U12.1 U12.15 U12.38 U12.39_1 U12.39_2 U12.39_3 U12.39_4 U12.39_5 U12.39_6 U12.39_7 U12.39_8 U12.39_9 U12.39_10 U12.39_11 U12.39_12 U12.39_13 U12.39_14 U12.39_15 U12.39_16 U12.39_17 U12.39_18 U12.39_19 U12.39_20 U12.39_21 U13.3 U13.29 USB1.5 USB1.SH1 USB1.SH2 USB1.SH3 USB1.SH4 USB1.SH5 USB1.SH6
INPUT: C1.1 D1.2 D2.1 J1.1 J1.2 J1.3 J1.4 R1.1
LCD_DC: J4.5 R41.1 R41.2 U12.24
LCD_RST: J4.4 R34.1 R34.2 U12.26
MISO: J4.9 R32.1 R32.2 U12.31
MOSI: J4.6 U12.37
N$1: C4.2 U3.3
N$2: C3.2 D3.2 U1.3
N$4: R6.2 R7.2 U4.3
N$5: R3.2 U2.3
N$9: C1.2 C2.2 C3.1 R1.2 R2.2
N$10: C5.2 U3.2
N$11: R8.2 R9.1 U4.4
N$12: D4.2 R16.1
N$13: R10.2 R11.2 U5.3
N$14: R12.2 R13.1 U5.4
N$15: R9.2 U4.1 U6.8
N$16: D3.1 R4.1 R5.2
N$17: R13.2 U5.1 U6.2
N$18: R17.1 R18.2 U13.8
N$20: R19.1 U13.9
N$21: R20.1 U13.11
N$23: C4.1 R23.2 U1.1 U1.4
N$24: R22.2 U12.34
N$25: C11.2 R15.2 R63.1 R63.2 U9.2
N$26: U9.7 U10.2
N$27: R21.2 U12.35
PREAMP: R6.1 R10.1 U3.1
PREAMP_BIT0: U3.5 U12.18
PREAMP_BIT1: U3.6 U12.17
PREAMP_BIT2: U3.7 U12.16
RXD: R22.1 U13.25
SAMPLING_CLK: U9.4 U11.3
SIGNAL: R15.1 R61.1 R61.2 U6.1 U7.1
SPI_CLK: J4.7 R33.1 R33.2 U12.30
T/DIV: R25.2 R43.1 R43.2 U12.23
TRIGGER_LEVEL: R26.2 R31.1 R31.2 R59.1 R59.2 R60.1 R60.2 U7.3 U12.13
TRIGGER_STATUS: R14.1 U7.4 U12.19
TXD: R21.1 R39.1 R39.2 U13.26
USB_DN: D6.2 R47.1 R47.2 U13.5 USB1.2
USB_DP: D5.2 R57.1 R57.2 U13.4 USB1.3
V/DIV: R24.2 R42.1 R42.2 U12.25
X_CURSOR: R27.2 R35.1 R35.2 R44.1 R44.2 U12.27
Y_CURSOR: R28.2 R40.1 R40.2 R45.1 R45.2 U12.33

## Tracks (layer width: path | path; a pad name or v marks a point on that pad's centre or on a via)
!DRDY
  Top 0.152: U10.4 60.97,57.56 60.33,56.91 U9.6 60.33,51.69 61.21,50.8 70.1,50.8 72.9,53.59 72.9,58.42 68.71,62.61 66.67,62.61 65.79,63.5 65.79,65.02 63.32,67.49 U12.12
+3.3V  (7 unrouted)
  Top 0.152: 37.08,79.1 R19.2 39.12,78.99 39.12,68.58 23.62,53.09 U8.2 | C10.2 51.61,55.52 51.61,54.1 | 54.1,55.78 U9.1 | 53.95,60.5 U9.16 | 75.89,48.21 76.5,48.21 U11.4 | U9.16 53.95,60.66 | 24.64,73.81 U13.7 24.61,73.18 24.89,72.9 | 18.09,53.14 U8.2 | U8.4 12.14,53.14 12.19,53.09 14.22,53.09 | 58.19,12.95 U3.8 | C9.2 17.83,47.3 | 56.77,28.65 U4.2 55.62,28.7 54.36,29.97 | 17.68,47.14 C9.2 | U8.4 11.99,52.98 | 85.19,15.8 R30.2 85.09,8.13 | 151.03,74.93 J4.8 152.65,74.93 153.92,73.66 153.92,57.4 153.67,57.15 J4.1 | 151.18,57.1 J4.1 | 36.83,5.08 25.91,5.08 22.1,8.89 22.1,36.58 12.01,46.66 U8.4 | 57.15,5.08 36.83,5.08 | 36.83,9.91 36.83,10.79 38.59,12.55 R4.2 | 36.83,9.91 36.83,5.08 | 79.52,48.21 U11.1 | U8.2 14.99,53.09 | 14.99,53.09 14.22,53.09 | 14.99,53.09 14.99,48.51 16.25,47.24 C9.2 | 14.22,53.09 14.22,46.24 16.09,44.7 C8.2 | C8.2 | 24.89,72.9 C7.1 29.12,66.64 30.23,65.53 30.23,63.5 28.96,62.23 12.95,62.23 10.41,59.69 10.41,53.59 10.67,53.34 11.76,53.34 U8.4 | 24.89,72.9 24.26,72.9 24.11,73.04 U13.6 | C8.2 17.78,43.43 18.03,43.18 28.82,43.18 D1.1 35.94,39.86 R14.2 39.12,38.86 40.44,37.54 44.65,37.54 45.47,38.35 45.47,39.32 45.41,39.37 U7.5 45.4,40.2 45.21,40.39 42.42,40.39 37.08,45.72 37.08,52.32 | 36.83,9.91 43.43,9.91 44.45,10.92 44.45,13.1 43.83,13.72 42.93,13.72 42.42,14.22 42.42,15.24 42.67,15.49 44.2,15.49 44.45,15.24 44.45,14.48 44.96,13.97 U1.2 | U3.8 57.62,12.91 57.15,12.45 57.15,5.08 | U3.8 67.1,12.91 75.18,4.83 81.79,4.83 | 81.79,4.83 85.09,8.13 | 85.09,8.13 87.38,10.41 R58.2 | 87.38,20.32 R29.2 | 81.79,4.83 97.28,4.83 99.57,7.11 99.57,10.14 R27.3 | 92.96,20.32 98.3,20.32 | 98.3,20.32 99.57,21.59 99.57,25.39 R3.3
  Top 0.152: 98.3,20.32 106.17,20.32 112.78,13.72 | 112.78,13.72 116.33,10.16 R24.3 | R26.3 143.5,8.38 139.19,8.38 133.86,13.72 112.78,13.72 | 92.96,20.32 92.96,24.38 85.09,32.26 U2.2 | J4.1 151.13,45.72 156.97,39.88 156.97,3.3 155.45,1.78 60.45,1.78 57.15,5.08 | U9.16 53.98,62.1 50.67,65.41 | 50.67,65.41 50.62,65.46 | 50.62,65.29 50.62,65.46 | 50.62,65.46 U12.2 | U9.1 53.98,54.48 53.59,54.1 51.61,54.1 | 37.08,52.32 R50.1 | U10.5 65.14,56.25 64.77,55.88 64.77,54.1 65.53,53.34 68.58,53.34 70.36,55.12 70.36,58.17 70.1,58.42 53.98,58.42 U9.1 | 54.36,39.37 54.36,34.54 | U5.2 49.02,28.96 49.28,28.7 49.28,27.43 49.78,26.92 52.83,26.92 54.36,28.45 54.36,29.97 | R28.3 151.89,25.4 152.91,26.42 152.91,34.8 143,44.7 R51.2 | R51.1 142.24,57.15 J4.1 | R25.3 114.55,25.4 112.27,27.69 112.27,37.08 101.85,47.5 88.9,47.5 88.14,48.26 R52.2 | U11.1 R52.1 | U11.1 U11.4 | 54.36,29.97 R54.1 | 54.36,39.37 62.74,39.37 65.53,42.16 R55.1 | U11.4 66.04,48.26 65.53,47.75 R55.2 | R54.2 54.36,34.54 | R49.2 92.96,20.32 | U6.4 54.31,34.59 54.36,34.54 | R49.1 87.38,20.32 | R58.1 87.38,20.32 | 54.36,39.37 54.36,44.38 52.46,46.27 52.46,52.32 51.57,53.21 50.72,53.21 | 37.08,52.32 37.08,54.36 44.96,62.23 47.5,62.23 50.67,65.41 | R50.2 42.67,52.32 43.18,51.82 43.18,50.8 43.94,50.04 48.26,50.04 50.72,52.5 50.72,53.21 | 50.72,53.21 50.72,54.03 50.8,54.1 51.61,54.1
+5V_VBUS  (1 unrouted)
  Top 0.152: 17.93,55.27 U8.3 20.83,55.39 | 37.47,71.66 R17.2 37.34,70.61 36.83,70.1 R48.2 35.56,67.06 23.89,55.39 20.83,55.39 | USB1.1 9.25,73.71 13.72,73.71 | 17.98,90.12 J3.1 22.35,90.17 23.88,88.65 23.88,86.87 22.73,85.72 19.68,85.72 13.72,79.76 13.72,73.71 | 13.72,73.71 15.95,73.71 17.88,71.78 17.88,70.1 | 17.88,70.1 20.07,70.1 | 20.07,70.1 22.61,70.1 | 22.61,70.1 C12.2 | R48.1 22.61,70.1 | R16.2 20.32,58.67 20.83,58.17 20.83,55.39 | 17.88,70.1 17.88,66.69 D7.2 | C13.2 20.07,70.1
D0
  Top 0.152: U9.8 62.87,51.94 63.25,51.56 69.22,51.56 71.75,54.1 71.75,58.11 68.24,61.63 65.62,61.63 64.3,62.95 64.3,65.31 62.05,67.56 U12.11
D1
  Top 0.152: U9.9 62.87,64.74 60.78,66.83 U12.10
D2
  Top 0.152: 61.57,60.5 U9.10 61.59,64.31 59.51,66.4 U12.9
D3
  Top 0.152: U9.11 60.35,60.66 60.35,63.86 58.22,65.99 58.22,69.2 U12.8
D4
  Top 0.152: U9.12 59.05,63.27 56.97,65.36 U12.7
D5
  Top 0.152: U12.6 55.7,65.38 57.78,63.29 U9.13
D6
  Top 0.152: U12.5 54.43,64.95 56.52,62.86 U9.14
D7
  Top 0.152: 55.24,61.16 U9.15 55.24,62.43 53.16,64.52 U12.4
DC_BIAS  (1 unrouted)
  Top 0.152: 48.31,21.08 R23.1 | 51.38,21.21 C14.2 48.38,21.22 R23.1 | R23.1 46.97,21.1 45.21,22.86 45.21,36.07 48.51,39.37 48.51,40.13 47.57,41.07 42.75,41.07 40.02,43.8 40.02,53.93 46.79,60.71 50.8,60.71 52.32,59.18 66.29,59.18 R37.1 | R37.2 79.25,60.96 79.25,61.72 75.44,65.53 68.07,65.53 65.86,67.74 U12.14
DC_OFFSET  (2 unrouted)
  Top 0.152: 81.38,37.24 C6.2 | 81.53,37.54 81.38,37.39 C6.2 | 61.04,26.52 R8.1 | R8.1 61.04,26.67 | R8.1 61.09,25.4 60.46,24.78 49.28,24.78 | 49.28,24.78 49.16,24.78 | R46.2 126.24,29.97 135.64,20.57 145.29,20.57 147.07,18.8 147.07,12.45 146.05,11.43 137.67,11.43 135.64,13.46 135.64,17.27 131.83,21.08 110.74,21.08 106.93,24.89 106.93,38.1 103.12,41.91 88.54,41.91 U2.4 84.44,37.81 U2.1 84.44,36.18 83.82,35.56 81.79,35.56 81.28,36.07 C6.2 | U12.36 51.89,85.02 52.32,84.58 73.91,84.58 77.72,80.77 95.5,80.77 99.82,76.45 99.82,61.47 101.6,59.69 125.22,59.69 126.24,58.67 R46.1 | 49.28,24.78 48.48,23.98 R11.1 | C6.2 73.4,37.33 71.37,35.31 71.37,28.7 69.32,26.65 69.31,26.67 R56.2 | R8.1 61.1,26.67 R56.1
DC_OFFSET_SELECT  (3 unrouted)
  Top 0.152: U12.22 71.25,80.9 97.54,54.61 R38.1 | S2.3 80.99,13.19 | 80.99,13.19 R30.1 C16.2 | 80.99,13.19 79.45,14.73 74.17,14.73 67.31,21.59 R36.1 | U6.6 55.95,35.23 55.37,35.81 55.37,37.85 56.13,38.61 66.04,38.61 67.31,39.88 | 67.31,39.88 70.87,43.43 R53.1 | R53.2 R38.2 | R36.2 67.31,39.88
EN
  Top 0.152: 85.19,24.94 C15.2 85.09,26.67 | 76.5,31.34 S1.3 76.71,31 76.71,28.7 78.74,26.67 85.09,26.67 | 52.07,69.04 U12.3 51.89,70.43 52.2,70.74 72.01,70.74 94.06,48.69 142.32,48.69 153.92,37.08 153.92,6.1 152.81,4.98 108.05,4.98 101.6,11.43 92.96,11.43 90.42,13.97 90.42,25.4 89.15,26.67 87.38,26.67 | 87.38,26.67 85.09,26.67 | 87.38,24.57 R29.1 87.38,26.67
GND  (via drill 0.35)  (2 unrouted)
  Top 0.152: 54.91,76.71 U12.39_2 | 58.57,76.86 U12.39_8 | C14.1 51.44,17.85 51.56,17.72 | v34.29,21.16 D2.2 | C2.1 37.67,17.78 36.4,19.05 | 36.4,19.05 v34.29,21.16 | R2.1 38.16,19.89 35.56,19.89 v34.29,21.16 | v34.29,21.16 30.4,17.27 J2.1 | R5.1 38.1,15.24 | 38.1,15.24 36.4,16.94 36.4,19.05 | 52.07,17.67 v52.12,17.72 | 39.62,10.92 39.37,11.18 39.37,12.26 | 39.37,12.26 39.38,12.27 | 39.37,12.26 39.37,13.97 38.1,15.24 | U3.4 49.74,10.96 48.77,11.94 48.77,14.99 51.5,17.72 51.56,17.72 | 51.56,17.72 v52.12,17.72 | v52.12,17.72 52.12,16.06 C5.1 | U2.5 v84.44,39.98 82.39,39.98 C6.1 | R7.1 58.55,22.23 v58.42,22.1 | C16.1 84.06,22.12 83.85,22.12 | 83.85,22.12 C15.1 | 83.85,22.12 S1.2 80.09,22.12 S2.2 74.19,18.52 v74.17,18.54 | U5.5 51.81,29.61 R12.1 52.07,35.23 | U12.39_8 U12.39_21 U12.39_9 | 58.67,74.93 58.67,75.8 U12.39_20 U12.39_8 | 58.67,74.93 58.67,74.89 U12.39_7 U12.39_17 U12.39_4 | USB1.SH3 USB1.SH4 USB1.SH5 6.6,71.32 6.6,69.6 | USB1.5 7.4,71.09 7.37,71.12 | J3.2 13.46,90.17 14.93,88.7 J3.3 15.24,85.16 15.24,82.55 13.21,80.52 13.21,76.71 11.39,74.89 USB1.SH1 9.18,74.89 8.38,75.69 7.37,75.69 | U8.1 19.57,50.79 21.84,48.51 v21.84,47.24 | v21.84,47.24 C9.1 | 59.05,57.78 U9.5 | 69.48,57.55 69.6,57.66 | 69.45,56.25 69.6,56.39 | U6.3 52.07,35.23 | 52.07,35.23 v51.99,35.23 | v59.01,35.88 U6.7 56.06,35.88 55.88,36.07 55.88,37.08 56.39,37.59 61.21,37.59 61.47,37.34 61.47,33.91 59.82,32.26 59.82,29.59 59.58,29.35 U4.5 | C7.2 v31.9,72.9 | D4.1 v12.29,58.67 | U11.2 v81.08,52.07 | R20.2 v31.49,76.2 | U7.2 v44.45,42.82 44.45,43.18 | v48.01,88.9 48.77,88.9 49.35,88.32 U12.38 49.35,85.72 | 20.08,65.28 C13.1 20.07,64.26 | D7.1 17.91,64.39 18.03,64.26 20.07,64.26
  Top 0.152: 20.07,64.26 22.61,64.26 | 22.61,64.26 24.38,64.26 24.89,64.77 v24.89,65.18 | C12.1 22.61,64.26 | v15.24,64.26 D6.1 | v22.76,71.37 22.61,71.52 U13.3 22.61,76.38 | 7.37,69.85 9.19,69.85 USB1.SH2 10.62,68.5 10.62,65.43 10.67,65.39 10.81,65.39 11.43,64.77 | 49.35,70.43 U12.1 49.35,67.08 v48.82,66.55 48.36,66.09 44.55,66.09 38.35,59.89 R62.1 | v145.29,16.51 145.29,15.26 R26.1 | v122.43,17.02 122.43,15.26 R24.1 | v99.57,17.02 99.57,15.26 | v99.57,32.26 99.57,30.5 | v122.43,32.26 122.43,30.5 | J4.3 v148.08,62.23 148.08,60.96 149.35,59.69 J4.2 | v145.29,32.26 145.29,30.5 R28.1 | C8.1 20.83,44.7 21.84,45.72 v21.84,47.24 | v38.1,77.47 37.34,76.71 R18.1 | U12.39_1 U12.39_5 | U12.39_2 U12.39_4 | U12.39_8 58.67,76.71 | 58.67,76.71 U12.39_4 | U12.39_5 56.88,76.72 58.67,74.93 | U12.39_9 U12.39_5 | U12.39_3 U12.39_5 | U12.39_2 U12.39_6 | U12.39_6 U12.39_8 | U12.39_2 U12.39_10 U12.39_1 | U12.39_5 U12.39_13 U12.39_2 | U12.39_1 U12.39_12 U12.39_4 | 58.67,76.71 58.66,76.72 U12.39_18 U12.39_5 | U12.39_6 U12.39_16 U12.39_5 | U12.39_3 U12.39_11 U12.39_2 | U12.39_9 U12.39_19 U12.39_6 | U12.39_3 U12.39_14 U12.39_6 | U12.39_4 U12.39_15 U12.39_5 | U13.29 25.4,73.91 | U13.29 25.91,78.99 | U13.29 20.57,78.74 20.57,78.41 | U13.29 20.83,73.91 20.57,73.91 | D5.1 11.32,65.29 v12.65,63.96 | 49.66,58.04 50.55,57.14 C10.1 51.56,57.84 v51.08,58.32 | 49.66,58.04 R62.2 | 69.44,58.12 69.6,58.12 | U9.3 56.52,53.84 v56.54,53.81 56.39,53.66 R64.2 | R64.1 45.21,53.59 49.66,58.04
  pour Top: 160,0 0,0 0,100 160,100
  pour Top: 146.81,97.79 144.02,95 155.19,92.71 152.91,92.71 147.07,98.55
  pour Top: 161.04,-16 167.89,-9.14 167.89,108.97 152.91,123.95 -23.88,123.95 -73.91,73.91 -73.91,-12.45 -40.39,-45.97 130.56,-45.97 168.15,-8.38
INPUT
  Top 0.152: J1.2 J1.4 J1.3 J1.1 | J1.2 J1.1 | J1.2 29.46,26.54 34.29,26.54 | 34.29,26.54 D2.1 34.56,23.5 C1.1 38.33,23.5 | R1.1 34.29,26.54 | D1.2 32.73,37.3 J1.1
LCD_DC  (1 unrouted)
  Top 0.152: U12.24 73.03,83.44 89.15,67.31 R41.1 | J4.5 R41.2
LCD_RST  (1 unrouted)
  Top 0.152: U12.26 64.59,87.96 66.5,89.87 133.9,89.87 137.16,86.61 R34.2 | J4.4 138.49,64.77 R34.1
MISO  (1 unrouted)
  Top 0.152: 151.03,77.52 J4.9 R32.1 | U12.31 58.24,90.5 61.47,93.73 137.41,93.73 140.97,90.17 140.97,78.49 141.99,77.47 R32.2
MOSI
  Top 0.152: J4.6 146.3,69.85 145.55,70.6 145.55,96.69 144.58,97.66 49.41,97.66 47.96,96.21 47.96,91.5 50.55,88.91 50.55,86.3 U12.37 50.62,87.31
N$1
  Top 0.152: U3.3 55.75,11.56 51.32,11.56 C4.2
N$2
  Top 0.152: C3.2 47.28,17.78 D3.2 47.8,17.26 47.99,17.26 48.26,16.99 48.26,16.51 46.37,14.62 U1.3
N$4
  Top 0.152: 56.52,25.45 56.21,25.45 56.07,25.59 58.47,25.59 | 58.47,25.59 56.18,25.55 R6.2 | 58.55,25.63 R7.2 58.59,25.59 58.47,25.59 | R6.2 55.91,25.63 | R6.2 55.24,26.31 55.24,27.43 55.88,28.07 56.76,28.07 U4.3
N$5
  Top 0.152: R3.2 96.98,27.99 96.27,27.99 96.16,27.99 90.37,27.99 85.74,32.62 U2.3
N$9
  Top 0.152: R1.2 40.22,23.83 C1.2 39.88,20.62 40.15,20.35 R2.2 40.15,17.89 C2.2 40.31,17.73 42.42,17.73 C3.1
N$10
  Top 0.152: 55.91,12.34 U3.2 53.78,12.26 52.07,13.97 C5.2
N$11
  Top 0.152: U4.4 58.9,28.04 60.88,28.04 61.04,28.19 R8.2 61.04,28.35 61.04,28.65 60.58,29.11 60.58,31.24 R9.1
N$12
  Top 0.152: R16.1 D4.2
N$13
  Top 0.152: 48.62,28.3 U5.3 46.1,28.31 46.1,26.16 46.72,25.55 R11.2 | 48.34,25.63 R11.2 | R11.2 R10.2
N$14
  Top 0.152: 50.6,28.3 U5.4 | U5.4 R12.2 | R13.1 49.66,31.61 49.66,28.57 49.93,28.31 U5.4
N$15
  Top 0.152: 56.92,29.41 U4.1 56.77,29.98 58.04,31.24 R9.2 59.04,32.75 60.71,34.42 60.71,35.43 59.6,36.53 U6.8
N$16
  Top 0.152: 47.62,16.66 D3.1 47.37,16.52 42.45,16.52 R5.2 40.15,14.22 R4.1
N$17
  Top 0.152: U5.1 49.04,29.61 49.28,29.84 49.28,31.48 R13.2 47.88,32.13 46.99,33.02 46.99,34.8 48.08,35.88 U6.2
N$18
  Top 0.152: 37.39,73.1 R17.1 R18.2 | R18.2 38.09,74.68 38.08,74.7 | R18.2 25.53,74.68 U13.8
N$20
  Top 0.152: U13.9 32.02,75.2 33.02,76.2 33.02,77.72 34.29,78.99 R19.1
N$21
  Top 0.152: 25.7,76.25 25.55,76.25 U13.11 R20.1
N$23
  Top 0.152: 48.16,19.56 R23.2 48.77,19.03 48.77,15.75 48,14.98 C4.1 46.99,13.34 | 46.23,13.34 46.99,13.34 | U1.4 43.69,14.62 44.99,13.32 U1.1 46.98,13.32 46.99,13.34
N$24
  Top 0.152: U12.34 54.43,93.65 53.34,94.74 R22.2
N$25  (1 unrouted)
  Top 0.152: 55.32,55.63 U9.2 | 55.11,40.42 R15.2 55.14,42.86 C11.2 | 55.46,55.54 U9.2 | U9.2 55.42,55.58 | 55.42,43.14 C11.2 | R63.1 56.39,43.18 56.13,42.93 C11.2 | R63.2 56.39,49.77 54.74,51.42 54.74,53.72 55.24,54.23 U9.2
N$26
  Top 0.152: U10.2 68.17,56.95 61.88,56.95 61.57,56.63 61.57,55.78 U9.7
N$27
  Top 0.152: U12.35 53.16,89.15 53.16,90.86 51.69,92.33 R21.2 48.77,92.2
PREAMP
  Top 0.152: R6.1 55.81,23.92 55.81,21.15 | R10.1 50.98,23.95 53.01,23.95 55.81,21.15 | U3.1 55.81,21.15
PREAMP_BIT0
  Top 0.152: U3.5 64.73,10.96 73.15,2.54 155.19,2.54 156.21,3.56 156.21,38.61 142.37,52.45 96.88,52.45 73.52,75.82 U12.18
PREAMP_BIT1
  Top 0.152: 58.34,11.58 U3.6 65.35,11.61 73.66,3.3 154.43,3.3 155.45,4.32 155.45,38.1 142.34,51.21 95.86,51.21 73.11,73.96 67.45,73.96 U12.17
PREAMP_BIT2
  Top 0.152: 58.34,12.34 U3.7 66.48,12.26 74.68,4.06 153.67,4.06 154.69,5.08 154.69,37.59 142.32,49.96 95.07,49.96 72.35,72.69 67.45,72.69 U12.16
RXD
  Top 0.152: R22.1 45.08,94.74 42.34,92.91 42.34,91.11 41.91,90.68 36.07,90.68 29.46,84.07 20.57,84.07 15.49,78.99 15.49,77.98 17.27,76.2 U13.25
SAMPLING_CLK
  Top 0.152: 76.66,51.71 76.66,52.02 U11.3 74.13,49.56 | 74.13,49.56 74.1,49.53 | U9.4 57.78,52.16 60.38,49.56 74.13,49.56
SIGNAL  (1 unrouted)
  Top 0.152: U6.1 51.86,36.53 51.31,37.08 51.31,39.62 | 51.31,39.62 52.07,40.39 R15.1 | U7.1 45.4,42.86 45.72,43.18 R61.1 | 51.31,39.62 51.31,42.16 50.29,43.18 R61.2
SPI_CLK  (1 unrouted)
  Top 0.152: U12.30 59.51,90.5 61.72,92.71 137.16,92.71 139.45,90.42 139.45,73.66 140.72,72.39 R33.1 | J4.7 R33.2
T/DIV  (1 unrouted)
  Top 0.152: U12.23 72.01,82.17 96.06,58.12 121.36,58.12 122.17,57.3 R43.1 | R25.2 116.08,27.94 115.06,28.96 115.06,37.59 116.59,39.12 120.14,39.12 122.17,41.15 R43.2
TRIGGER_LEVEL  (3 unrouted)
  Top 0.152: R26.2 137.67,12.7 136.4,13.97 136.4,17.78 132.33,21.84 111,21.84 107.7,25.15 107.7,38.61 101.09,45.21 R60.2 | 85.6,45.21 62.74,45.21 60.2,47.75 R31.2 | U7.3 43.5,43.5 47.75,47.75 R31.1 | U12.13 64.59,67.96 68.18,64.37 74.57,64.37 76.45,62.48 76.45,58.67 78.23,56.9 R59.1 | 85.6,45.21 85.6,53.45 82.15,56.9 R59.2 | R60.1 85.6,45.21
TRIGGER_STATUS
  Top 0.152: 43.59,39.37 U7.4 | U7.4 43.43,39.52 | 39.42,41.73 R14.1 | U7.4 43.5,38.93 43.18,38.61 42.29,38.61 41.4,39.5 41.4,40.39 40.37,41.42 R14.1 | R14.1 39.12,42.18 34.29,47.01 34.29,57.03 44.11,66.85 46.4,66.85 48.49,68.95 48.49,75.92 54.61,82.04 59.18,82.04 64.26,76.96 66.73,76.96 U12.19 66.63,76.86
TXD  (1 unrouted)
  Top 0.152: R39.2 36.27,92.33 28.78,84.84 20.14,84.84 14.73,79.42 14.73,77.72 16.76,75.7 U13.26 | R39.1 R21.1
USB_DN  (1 unrouted)
  Top 0.152: USB1.2 9.25,73.1 14.22,73.1 15.24,72.08 15.24,68.33 | 15.24,68.33 D6.2 | 15.24,68.33 15.75,68.33 16.51,67.56 16.51,64.01 16.76,63.75 27.18,63.75 27.43,64.01 R47.1 | R47.2 27.43,70.36 25.4,72.39 23.88,72.39 23.61,72.65 U13.5
USB_DP  (1 unrouted)
  Top 0.152: 9.25,72.34 USB1.3 | USB1.3 9.09,72.34 | USB1.3 12.19,72.39 12.95,71.63 12.95,68.33 | 12.95,68.33 11.68,68.33 11.18,67.82 D5.2 | U13.4 23.11,72.64 23.88,71.88 24.89,71.88 26.16,70.61 26.16,66.56 26.68,66.04 28.7,66.04 29.46,65.28 29.46,63.75 28.7,62.99 14.48,62.99 12.95,64.52 R57.1 | 12.95,68.33 R57.2
V/DIV  (1 unrouted)
  Top 0.152: 119.89,12.69 R24.2 133.6,12.7 138.94,7.37 151.13,7.37 151.64,7.87 151.64,17.02 147.32,21.34 138.68,21.34 130.05,29.97 R42.2 | U12.25 65.86,87.96 66.55,88.65 71.63,88.65 77.85,82.42 96.14,82.42 101.35,77.22 101.35,61.98 102.62,60.71 128.52,60.71 130.05,59.18 R42.1
X_CURSOR  (2 unrouted)
  Top 0.152: R27.2 105.92,12.7 112.78,5.84 150.88,5.84 152.4,7.37 152.4,18.03 147.57,22.86 141.22,22.86 133.86,30.23 R44.2 | U12.27 63.32,88.47 65.79,90.93 77.92,90.93 R35.2 | R35.1 77.98,84.84 79.25,83.57 97.28,83.57 102.62,78.23 102.62,62.74 103.89,61.47 132.08,61.47 133.86,59.69 R44.1
Y_CURSOR  (2 unrouted)
  Top 0.152: R40.1 58.29,95.25 55.7,92.66 U12.33 | R40.2 104.39,82.8 104.39,62.99 104.85,62.53 135.47,62.53 137.41,60.6 R45.1 | R45.2 137.41,30.23 139.7,27.94 R28.2